# Altium PCB IR Sensors.PcbDoc
Units mm, origin at the board's own origin, x right, y up, seen from the top; angles counter-clockwise.
Board outline 100 x 100 mm, 2 copper layers (Top Layer, Bottom Layer); 24 components, 116 nets, 71 pads, 0 vias.
Unrouted connection lines stored in the file: 12.
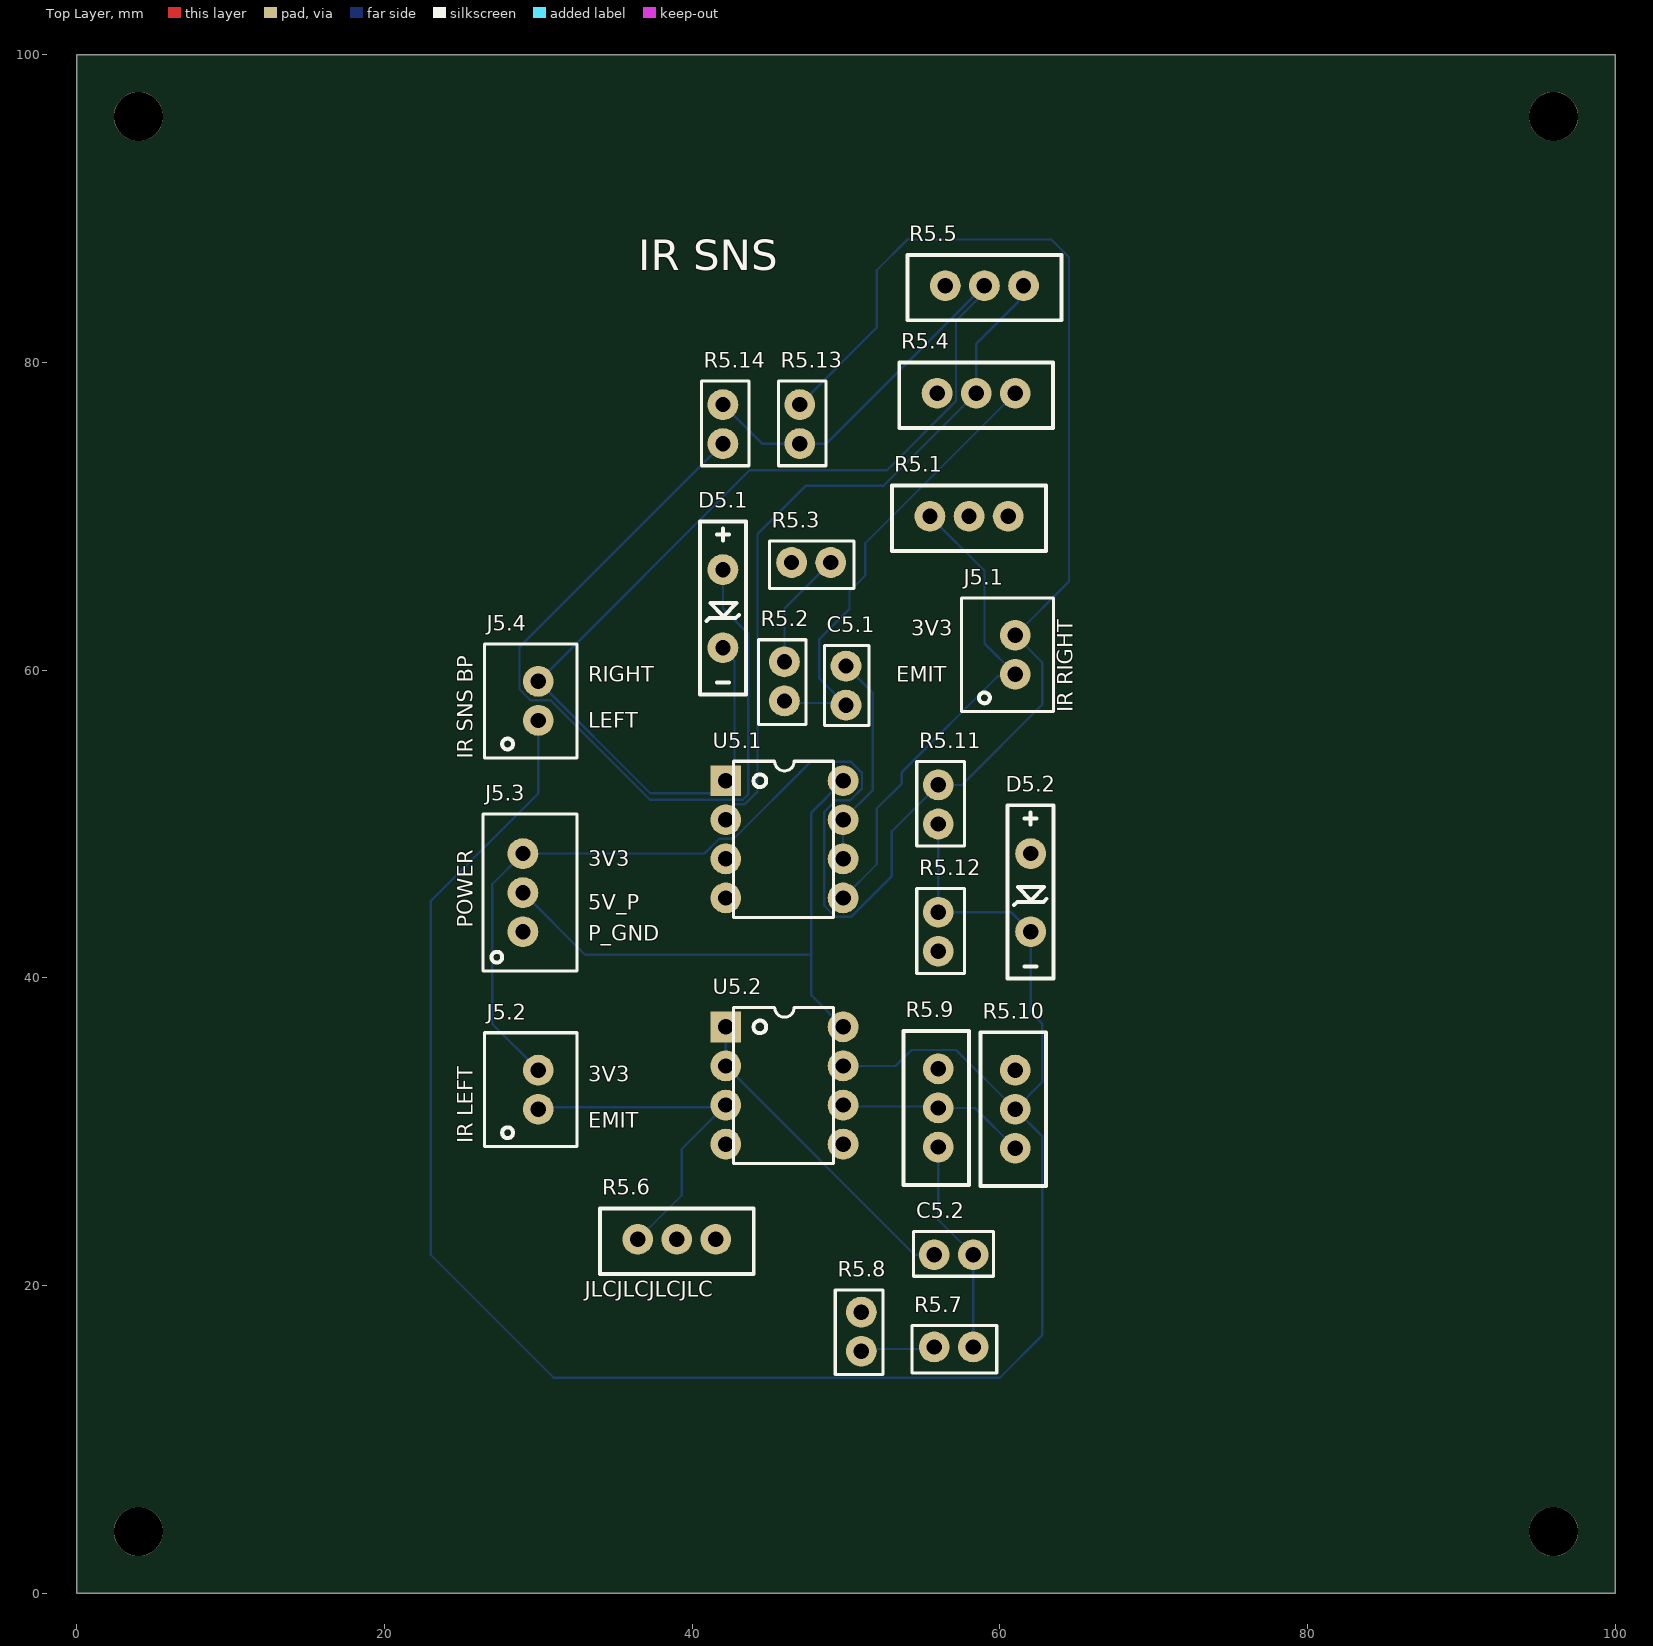
[diagram p0: Top Layer view]
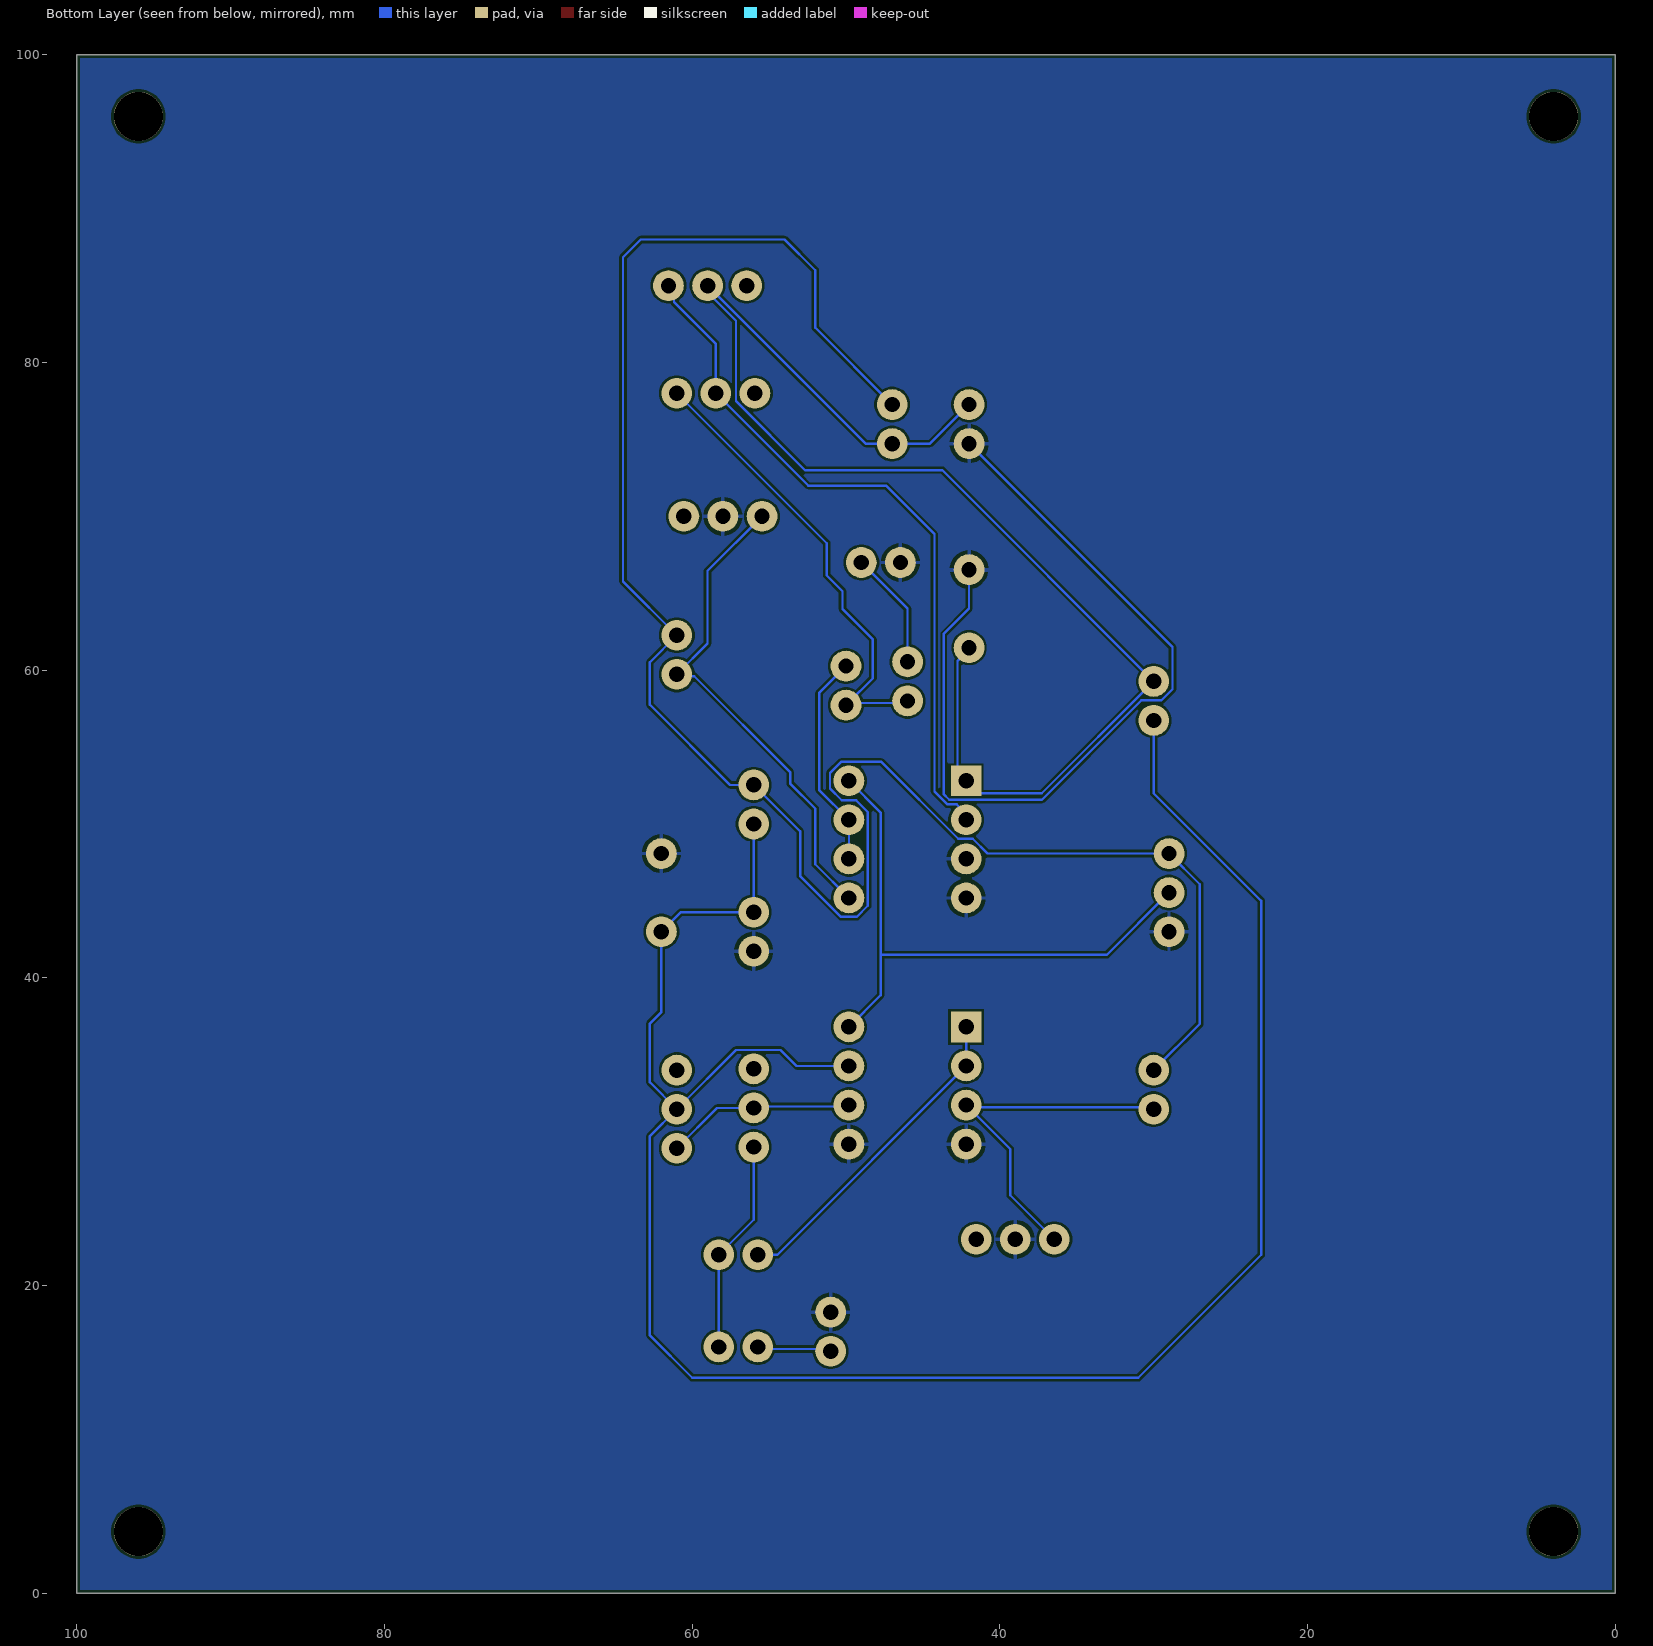
[diagram p1: Bottom Layer view, seen from below]
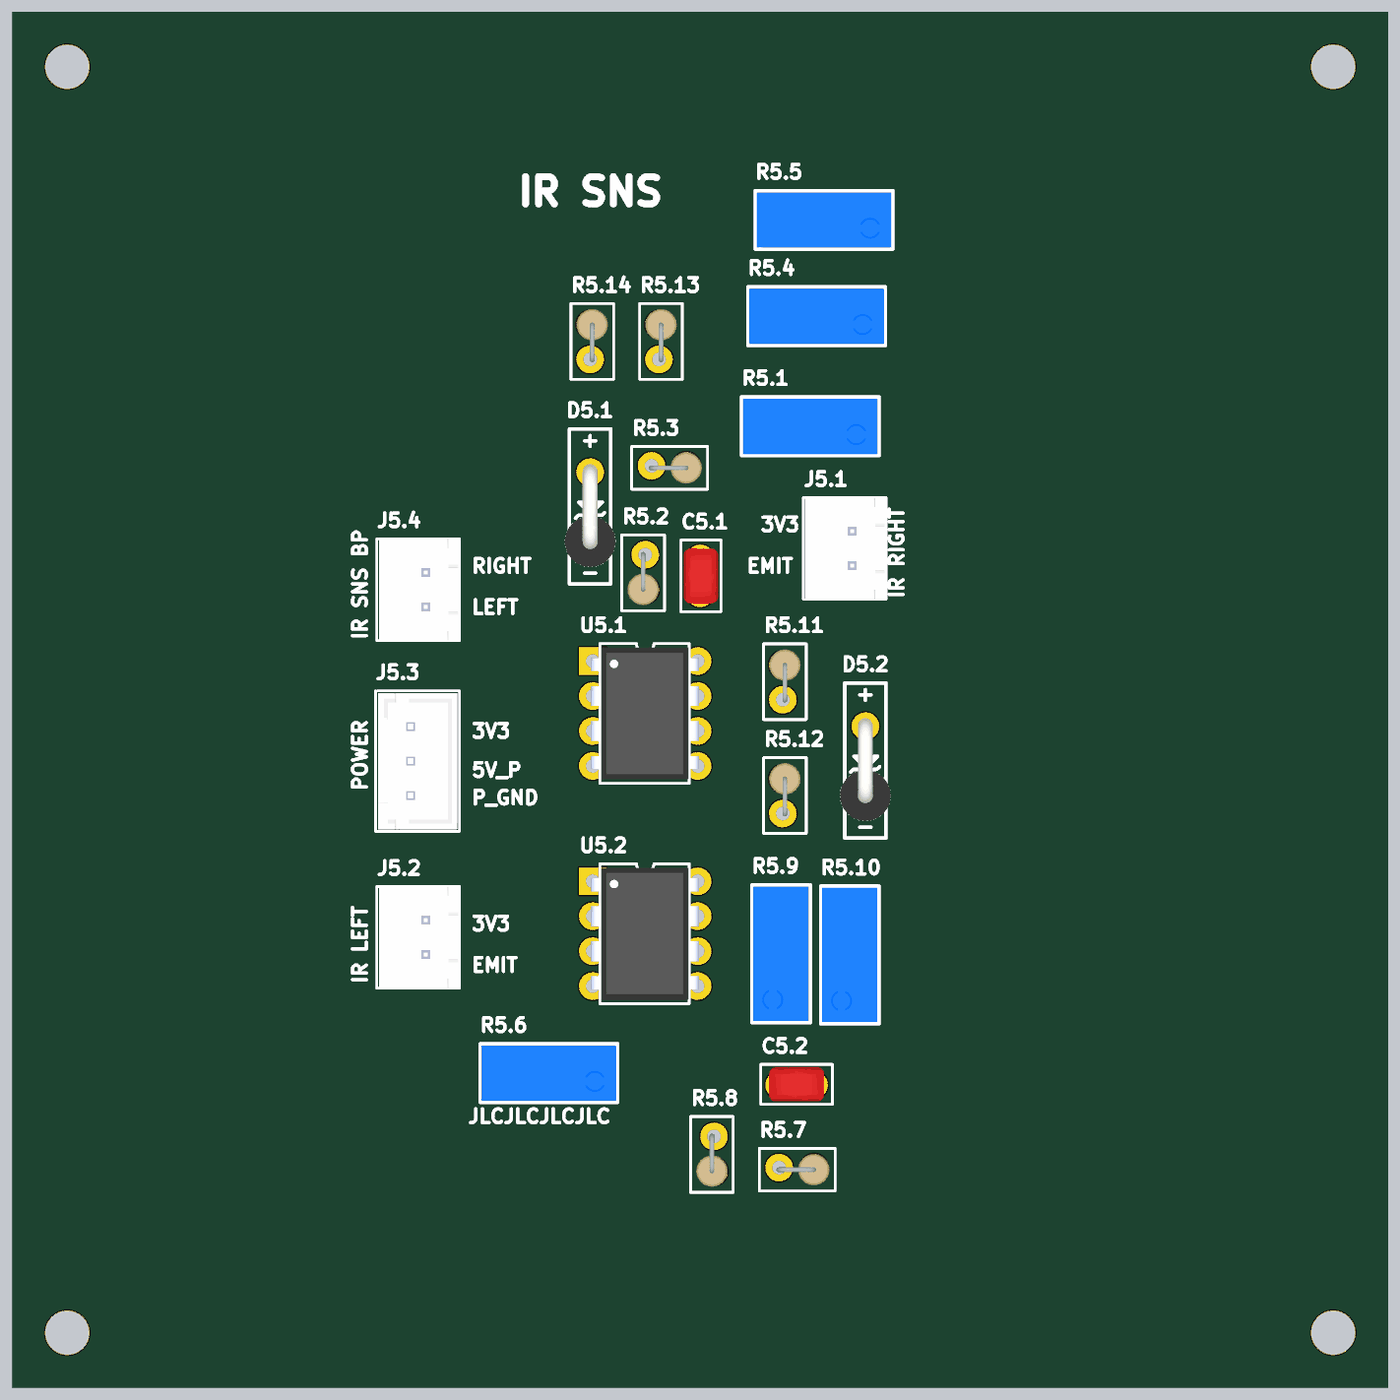
[diagram p2: 3D render of the assembled board from above, using the file's embedded part models]

## Layer stack, top to bottom
Top Solder: solder mask 0.0102, Solder Resist, Dk 3.5
Top Layer: signal copper 0.0356
Dielectric 1: dielectric 0.32, FR-4, Dk 4.8
Bottom Layer: signal copper 0.0356
Bottom Solder: solder mask 0.0102, Solder Resist, Dk 3.5

## Board outline
0,0 0,100 100,100 100,0

## Design rules (kind name [scope] priority, off if disabled: settings)
BoardOutlineClearance [All] p1: gap=0.2 ignorepadtopadclearanceinfootprint=FALSE
Clearance [All] p1: gap=0.152 ignorepadtopadclearanceinfootprint=FALSE
HoleSize [All] p1: absolutevalues=TRUE maxlimit=100 minlimit=0.4 maxpercent=80.000 minpercent=20.000
PolygonConnect [All] p1: connectstyle=Relief reliefconductorwidth=0.254 reliefentries=4 polygonreliefangle="90 Angle" airgapwidth=0.254
RoutingVias [All] p1: holewidth=0.4 width=0.8 viastyle="Through Hole" minholewidth=0.4 minwidth=0.6 maxholewidth=100 maxwidth=100
SilkToSilkClearance [All] p1: silktosilkclearance=0
SilkToSolderMaskClearance [IsPad] p1: minsilkscreentomaskgap=0 clearancetoexposedcopper=TRUE
SolderMaskExpansion [All] p1: expansion=0.102 istentingtop=FALSE
Width [All] p1: maxlimit=100 minlimit=0.152 preferedwidth=0.152
27 further rules are at their usual default settings.

## Components (designator, comment, footprint, x,y, rotation, side; value= is the part's Value field where it differs from the comment)
C5.1 "470n" "Non Polarized Cap" 50,59 r270 top
C5.2 "470n" "Non Polarized Cap" 57,22 r0 top
D5.1 "3.3V" "Zener Generic" 42,64 r270 top
D5.2 "3.3V" "Zener Generic" 62,45.54 r270 top
J5.1 "IR Right" "2pos JST" 61,61 r90 top
J5.2 "IR Left" "2pos JST" 30,32.73 r90 top
J5.3 "Power" "3pos JST" 29,45.54 r90 top
J5.4 "IR BP Out" "2pos JST" 30,58 r90 top
R5.1 "100k" "Pot Generic" 58,70 r180 top
R5.2 "100" Res_Generic 46,59.27 r270 top
R5.3 "100" Res_Generic 47.73,67 r0 top
R5.4 "10k" "Pot Generic" 58.46,78 r180 top
R5.5 "100k" "Pot Generic" 59,85 r180 top
R5.6 "100k" "Pot Generic" 39,23 r180 top
R5.7 "100" Res_Generic 57,16 r0 top
R5.8 "100" Res_Generic 51,17 r270 top
R5.9 "10k" "Pot Generic" 56,31.54 r90 top
R5.10 "100k" "Pot Generic" 61,31.46 r90 top
R5.11 "Res_Generic" Res_Generic 56,51.27 r90 top
R5.12 "Res_Generic" Res_Generic 56,43 r90 top
R5.13 "Res_Generic" Res_Generic 47,76 r90 top
R5.14 "Res_Generic" Res_Generic 42,76 r90 top
U5.1 "TL082IP" DIP8 46,49 r0 top
U5.2 "TL082IP" DIP8 46,33 r0 top

## Footprints (in the part's own frame and the unit in brackets; to place one, negate y for a bottom-side part, rotate by r counter-clockwise, add the part's x,y. Pads: shape width x height; smd on the part's side, far side on the other; paste and mask are expansions set on the pad)
"2pos JST" [mm]
  round 2 hole 1: 1(-1.27,0) 2(1.27,0)
  silkscreen extent -3.7,-2.5 3.7,3.5, body extent -3.7,-2.4 3.7,3.35, height 7.01
"3pos JST" [mm]
  round 2 hole 1: 1(-2.54,0) 2(0,0) 3(2.54,0)
  silkscreen extent -5.1,-3.5 5.1,2.6, body extent -4.95,-3.35 4.95,2.4, height 7
DIP8 [mm]
  rect 2x2 hole 1: 1(-3.81,3.81)
  round 2 hole 1: 2(-3.81,1.27) 3(-3.81,-1.27) 4(-3.81,-3.81) 5(3.81,-3.81) 6(3.81,-1.27) 7(3.81,1.27) 8(3.81,3.81)
  silkscreen extent -3.3,-5.08 3.2,5.08, body extent -3.96,-4.79 3.91,4.79, height 5.33
"Non Polarized Cap" [mm] "Cap Generic THT"
  round 2 hole 1: 1(-1.27,0) 2(1.27,0)
  silkscreen extent -2.6,-1.4 2.6,1.5, body extent -2,-1.2 2,1.3, height 6
"Pot Generic" [mm]
  round 2 hole 1: 1(-2.54,0) 2(0,0) 3(2.54,0)
  silkscreen extent -5,-2 5,2.25, body extent -4.89,-1.86 4.89,2.15, height 11.41
Res_Generic [mm] "Cap Generic THT Footprint"
  round 2 hole 1: 1(-1.27,0) 2(1.27,0)
  silkscreen extent -2.71,-1.7 2.8,1.4, body extent -1.47,-1.3 2.4,1, height 8.18
"Zener Generic" [mm]
  round 2 hole 1: 1(-2.54,0) 2(2.54,0)
  silkscreen extent -5.68,-1.5 5.58,1.5, body extent -3.12,-1.86 4.37,1.86, height 11.55

## Part data
C5.1 C5.2: library part Cap_Generic
D5.1 D5.2: library part Zener_Generic
J5.1 J5.2 J5.4: library part "2pos Conn", "2pos Conn JST"
J5.3: library part "3pos Conn", "3pos Conn"
R5.1 R5.4 R5.5 R5.6 R5.9 R5.10: library part Pot_Generic
R5.2 R5.3 R5.7 R5.8: library part Res_Generic
U5.1 U5.2: library part "TL082IP Op Amp", "TL082IP IC OPAMP JFET 2 CIRCUIT 8DIP", Supplier Part Number 1=595-TL082IP, Supplier 1=Mouser

## Free pads (board coordinates)
  round 3.2 hole 3.2: ""(4,4) ""(4,96) ""(96,4) ""(96,96)

## Nets (pads, with @x,y where several pads share a name; then routed paths per layer and width w, separated by ;. In a path a pad name is that pad's centre, name@x,y a point inside that pad or via, vN(x,y) a via of type N, cw(c..) or ccw(c..) an arc to the next point about the centre after c; other vN are vias at no path point)
3.3V_P: J5.1.2 J5.2.2 J5.3.3 R5.11.2 R5.13.2 | length 128.9
  Bottom Layer w0.152: J5.2.2 27,37 27,46.08 J5.3.3 40.802,48.08 41.764,49.041 42.699,49.041 47.696,54.039 50.319,54.039 51.039,53.319 51.039,52.301 50.278,51.54 49.342,51.54 48.581,50.779 48.581,44.681 49.301,43.961 50.319,43.961 52.983,46.625 52.983,49.523 R5.11.2 57.54,52.54 62.75,57.75 62.75,60.52 J5.1.2 64.5,65.77 64.5,86.842 63.342,88 54,88 52,86 52,82.27 R5.13.2
5V_ARM: 
5V_P: J5.3.2 U5.1.8 U5.2.8 | length 38.1
  Bottom Layer w0.152: J5.3.2 33.04,41.5 47.75,41.5 ; U5.2.8 47.75,38.87 47.75,41.5 ; U5.1.8 47.75,50.75 47.75,41.5
5V_SERVO: 
8V: 
15V: 
ARM_SERV_BP_OUT: 
ARM_SERV_PWM: 
BOX_SERV_BP_OUT: 
BOX_SERV_PWM: 
BRIDGE_SERV_BP_OUT: 
BRIDGE_SERV_PWM: 
CLAW_SERV_BP_OUT: 
CLAW_SERV_PWM: 
DCLK: 
DIO: 
ECHO_F_M: 
ECHO_S_L: 
ECHO_S_R: 
ECHO_SPARE: 
ENCODER_L_I: 
ENCODER_L_Q: 
ENCODER_R_I: 
ENCODER_R_Q: 
IR_LEFT_TRANS: J5.2.1 R5.6.3 U5.2.3 | length 23.2
  Bottom Layer w0.152: J5.2.1 30.135,31.595 U5.2.3@42.055,31.595 ; R5.6.3 39.325,25.865 39.325,28.865 U5.2.3@42.055,31.595 ; U5.2.3 U5.2.3@42.055,31.595
IR_RIGHT_TRANS: J5.1.1 R5.1.3 U5.1.5 | length 32.3
  Bottom Layer w0.152: U5.1.5 52,47.38 52,49.438 ; 52,49.439 52,51 53.635,52.635 53.635,53.385 59.861,59.611 60.881,59.611 J5.1.1 59,61.73 59,66.46 R5.1.3
IR_SNS_LEFT: D5.2.2 J5.4.1 R5.10.2 R5.11.1 R5.12.2 U5.2.7 | length 135.3
  Bottom Layer w0.152: J5.4.1 30,52 23,45 23,22 31,14 60,14 62.75,16.75 62.75,29.71 R5.10.2 ; U5.2.7 53.211,34.27 54.25,35.309 57.151,35.309 R5.10.2 ; R5.11.1 R5.12.2 60.73,44.27 D5.2.2 62,37.782 62.75,37.032 62.75,33.21 R5.10.2
IR_SNS_RIGHT: D5.1.2 J5.4.2 R5.5.2 R5.13.1 R5.14.2 U5.1.1 | length 90
  Bottom Layer w0.152: D5.1.2 42,61.349 42.75,60.599 42.75,53.37 41.38,52 37.27,52 J5.4.2 43.73,73 52.658,73 57.149,77.491 57.149,82.718 59,84.569 R5.5.2 48.73,74.73 R5.13.1 44.54,74.73 R5.14.2
LEFT+: 
LEFT-: 
LEFT_FWD: 
LEFT_FWD_BP_OUT: 
LEFT_REV: 
LEFT_REV_BP_OUT: 
M_GND: 
MAGNET_SNS: 
NetC1.8_2: 
NetC5.1_1: C5.1.1 U5.1.6 U5.1.7 | length 14.1
  Bottom Layer w0.152: U5.1.6 U5.1.7 51.75,52.21 51.75,58.52 C5.1.1
NetC5.1_2: C5.1.2 R5.2.2 R5.4.1 | length 30.2
  Bottom Layer w0.152: R5.2.2 46.135,57.865 C5.1.2@49.865,57.865 ; C5.1.2 C5.1.2@49.865,57.865 ; R5.4.1 51.25,68.25 51.25,66.158 50.229,65.137 50.229,63.973 48.25,61.995 48.25,59.48 C5.1.2@49.865,57.865
NetC5.2_1: C5.2.1 U5.2.1 U5.2.2 | length 21.2
  Bottom Layer w0.152: U5.2.1 U5.2.2 54.46,22 C5.2.1
NetC5.2_2: C5.2.2 R5.7.2 R5.9.1 | length 13.9
  Bottom Layer w0.152: R5.9.1 56,24.27 C5.2.2 R5.7.2
NetQ2.1_2: 
NetQ2.1_3: 
NetQ2.2_2: 
NetQ2.2_3: 
NetQ2.3_2: 
NetQ2.3_3: 
NetQ2.4_2: 
NetQ2.4_3: 
NetQ3.1_2: 
NetQ3.1_3: 
NetQ3.2_2: 
NetQ3.2_3: 
NetQ3.3_2: 
NetQ3.3_3: 
NetQ3.4_2: 
NetQ3.4_3: 
NetQ3.5_1: 
NetQ3.6_1: 
NetQ3.7_1: 
NetQ3.8_1: 
NetR2.3_2: 
NetR2.6_2: 
NetR2.7_1: 
NetR2.8_1: 
NetR2.13_2: 
NetR2.14_2: 
NetR2.15_2: 
NetR2.16_2: 
NetR3.3_2: 
NetR3.4_1: 
NetR3.5_1: 
NetR3.6_2: 
NetR3.11_2: 
NetR3.12_2: 
NetR3.13_1: 
NetR3.14_2: 
NetR4.11_2: 
NetR4.13_2: 
NetR4.15_2: 
NetR4.17_2: 
NetR4.19_2: 
NetR5.2_1: R5.2.1 R5.3.2 | length 8.5
  Bottom Layer w0.152: R5.2.1@46.553,61.093 R5.2.1 46,64 R5.3.2
NetR5.4_2: R5.4.2 R5.5.1 U5.1.2 | length 46.1
  Bottom Layer w0.152: U5.1.2 42.19,50.672 42.795,51.277 43.411,51.277 44.25,52.116 44.25,68.86 47.39,72 52.46,72 R5.4.2 58.46,81.21 61.186,83.936 61.186,84.646 R5.5.1
NetR5.7_1: R5.7.1 R5.8.2 | length 4.8
  Bottom Layer w0.152: R5.8.2 51.135,15.865 55.595,15.865 R5.7.1
NetR5.9_2: R5.9.2 R5.10.1 U5.2.6 | length 12.4
  Bottom Layer w0.152: U5.2.6 49.905,31.635 55.905,31.635 R5.9.2 58.38,31.54 R5.10.1
P_GND: D5.1.1 D5.2.1 J5.3.1 R5.1.2 R5.3.1 R5.6.2 R5.8.1 R5.12.1 R5.14.1 U5.1.3 U5.1.4 U5.2.4 U5.2.5 | length 54.7
  Bottom Layer w0.152: D5.1.1 42,64 43.652,62.348 43.652,51.948 43.285,51.581 37.258,51.581 30.798,58.041 29.491,58.041 28.771,58.761 28.771,61.501 R5.14.1
REF_F_L_COL: 
REF_F_L_LED: 
REF_F_L_SNS: 
REF_F_R_COL: 
REF_F_R_LED: 
REF_F_R_SNS: 
REF_R_COL: 
REF_R_LED: 
REF_R_SNS: 
REF_S_L_COL: 
REF_S_L_LED: 
REF_S_L_SNS: 
REF_S_R_COL: 
REF_S_R_LED: 
REF_S_R_SNS: 
RIGHT+: 
RIGHT-: 
RIGHT_FWD: 
RIGHT_FWD_BP_OUT: 
RIGHT_REV: 
RIGHT_REV_BP_OUT: 
SPARE_1: 
SW_CLAW+: 
SW_CLAW_SNS: 
SW_FRONT+: 
SW_FRONT_SNS: 
SW_REAR+: 
SW_REAR_SNS: 
TRIG_COM: 
pads on no net: R5.1.1 R5.4.3 R5.5.3 R5.6.1 R5.9.3 R5.10.3

## Polygon pours and split planes (outlines as drawn)
P_GND on Bottom Layer "GND " (solid, remove dead copper, pour order 0): 0,100 100,100 100,0 0,0

## Silkscreen, mask and mechanical layers (free items; w line width, h text height)
Top Overlay:
  text "IR SNS" at 36.5,86 h2
  text "3V3" at 54.254,62.254 h1
  text "RIGHT" at 33.254,59.254 h1
  text "EMIT" at 53.254,59.254 h1
  text "IR RIGHT" at 64.746,57.254 h1 r90
  text "LEFT" at 33.254,56.254 h1
  text "IR SNS BP" at 25.746,54.254 h1 r90
  text "3V3" at 33.254,47.254 h1
  text "5V_P" at 33.254,44.421 h1
  text "POWER" at 25.746,43.254 h1 r90
  text "P_GND" at 33.254,42.421 h1
  text "3V3" at 33.254,33.254 h1
  text "EMIT" at 33.254,30.254 h1
  text "IR LEFT" at 25.746,29.254 h1 r90
  text "JLCJLCJLCJLC" at 33.004,19.254 h1
Mechanical 1:
  the board outline again, w0.2